# Altium PCB KCD_BRUSH_MOTOR_LH1.PcbDoc
Units mm, origin at the board's own origin, x right, y up, seen from the top; angles counter-clockwise.
Board outline 16.2 x 14.79 mm, 2 copper layers (Top Layer, Bottom Layer); 8 components, 7 nets, 27 pads, 6 vias.
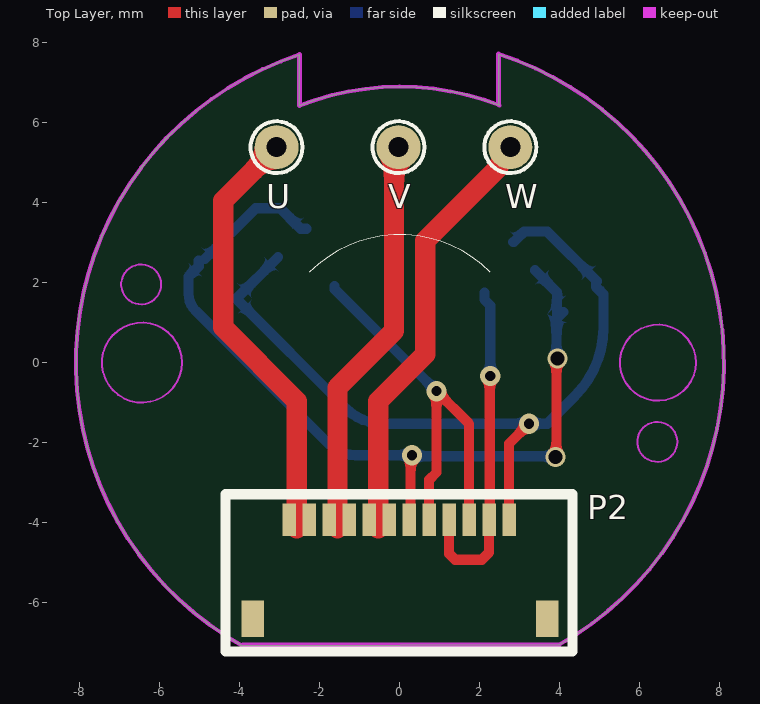
[diagram p0: Top Layer view]
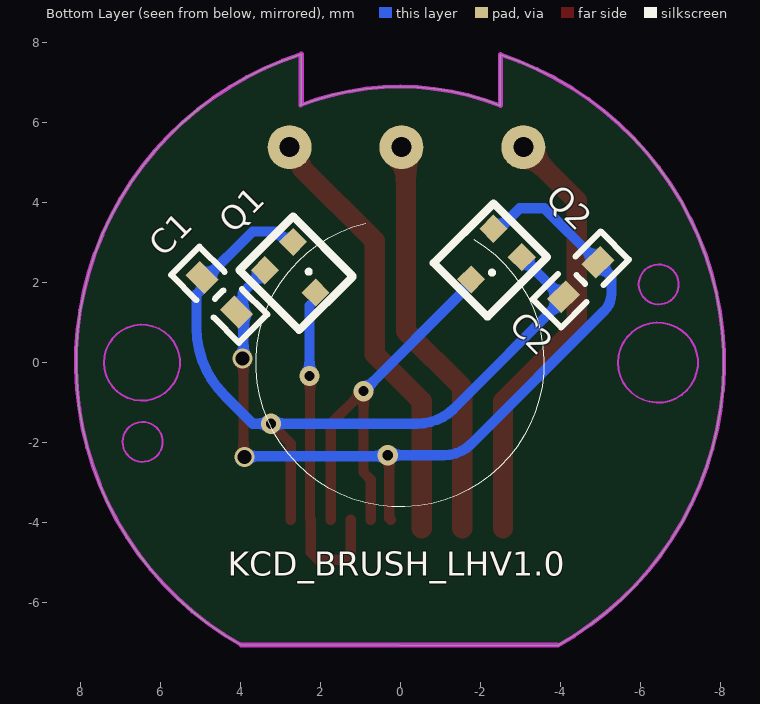
[diagram p1: Bottom Layer view, seen from below]

## Layer stack, top to bottom
Top Solder: solder mask 0.0102, Solder Resist, Dk 3.5
Top Layer: signal copper 0.0356
Dielectric 1: dielectric 0.32, FR-4, Dk 4.8
Bottom Layer: signal copper 0.0356
Bottom Solder: solder mask 0.0102, Solder Resist, Dk 3.5

## Board outline
-3.941,-7.074 cw(c0.001,0.002) -2.511,7.703 -2.511,6.429 cw(c0.001,0.002) 2.493,6.436 2.469,6.46 2.469,7.717 cw(c0.001,0.002) 3.976,-7.056

## Design rules (kind name [scope] priority, off if disabled: settings)
Clearance [All] p1: gap=0.203 ignorepadtopadclearanceinfootprint=FALSE except(0.15: Arc-SMDPad Track-SMDPad SMDPad-SMDPad)
PolygonConnect [All] p1: connectstyle=Relief reliefconductorwidth=0.254 reliefentries=4 polygonreliefangle="90 Angle" airgapwidth=0.254
RoutingVias [All] p1: holewidth=0.254 width=0.508 viastyle="Through Hole" minholewidth=0.127 minwidth=0.254 maxholewidth=0.762 maxwidth=1.27
SolderMaskExpansion [All] p1: expansion=0.102 istentingtop=FALSE
Width [All] p1: maxlimit=0.762 minlimit=0.203 preferedwidth=0.254
30 further rules are at their usual default settings.

## Components (designator, comment, footprint, x,y, rotation, side; value= is the part's Value field where it differs from the comment)
C1 "100nF/50V" "C 0402_M" 4.521,1.702 r225 bottom (schematic designator C6)
C2 "100nF/50V" "C 0402_M" -4.52,2.082 r135 bottom (schematic designator C6)
P2 "Header 12" SMD-12 2.731,-3.925 r180 top
Q1 "MT9101DT" VTDFN-6_L1.6x1.6 2.373,2.014 r315 bottom
Q2 "MT9101DT" VTDFN-6_L1.6x1.6 -2.039,2.344 r45 bottom
U "HD" HD -3.083,5.387 r90 top
V "HD" HD -0.035,5.387 r90 top
W "HD" HD 2.759,5.387 r90 top

## Footprints (in the part's own frame and the unit in brackets; to place one, negate y for a bottom-side part, rotate by r counter-clockwise, add the part's x,y. Pads: shape width x height; smd on the part's side, far side on the other; paste and mask are expansions set on the pad)
"C 0402_M" [mil] "无极性贴片电容"
  rect 26x20 smd: 1(-24,0) 2(24,0)
  silkscreen extent -47,-20 47,20, body extent -20,-10 20,10, height 21
HD [mm]
  round 1.1 hole 0.5: 1(0,0)
  silkscreen extent -0.65,-0.65 0.65,0.65
SMD-12 [mil]
  rect 22x36 smd: 0(252.38,97.5) 0/2(-37.62,97.5)
  rect 13x32 smd: 1(216.53,0) 2(196.85,0) 3(177.16,0) 4(157.48,0) 5(137.8,0) 6(118.11,0) 7(98.43,0) 8(78.74,0) 9(59.05,0) 10(39.37,0) 11(19.68,0) 12(0,0)
  silkscreen extent -62,-25 279,130
VTDFN-6_L1.6x1.6 [mm]
  rect 0.5x0.5 smd: 1(-0.5,-0.921) 2(0.5,-0.921) 3(0,0.369)
  silkscreen extent -0.95,-1.37 0.95,0.74

## Part data
C1 C2: library part C, "Capacitor"
P2: "Header, 12-Pin"

## Via types
v1: diameter 0.508, hole 0.254, Top Layer to Bottom Layer, tented both sides, 4 vias
v2: diameter 0.5, hole 0.35, Top Layer to Bottom Layer, tented both sides, 2 vias

## Nets (pads, with @x,y where several pads share a name; then routed paths per layer and width w, separated by ;. In a path a pad name is that pad's centre, name@x,y a point inside that pad or via, vN(x,y) a via of type N, cw(c..) or ccw(c..) an arc to the next point about the centre after c; other vN are vias at no path point)
3V3: C1.1 C2.1 P2.12 Q1.1 Q2.1 | length 19.9
  Top Layer w0.254: P2.12 2.731,-2.018 v1(3.226,-1.524)
  Bottom Layer w0.254: Q2.1 -4.089,1.596 -1.348,-1.145 ccw(c-0.434,-0.231) -0.434,-1.524 v1(3.226,-1.524) 3.683,-1.524 4.385,-0.822 ccw(c2.691,0.872) 5.086,0.872 5.086,1.711 4.898,1.899 4.898,2.006 4.928,2.035 3.686,3.277 3.103,3.277 2.845,3.019 Q1.1@2.835,3.019
GND: C1.2 C2.2 P2.7 Q1.2 Q2.2 | length 21.9
  Top Layer w0.254: P2.7 0.268,-3.888 0.268,-2.348 v1(0.305,-2.311) ; v2(3.886,-2.362) 3.912,-2.337 3.912,0.076 v2(3.937,0.102)
  Bottom Layer w0.254: C2.2@-5.029,2.547 -5.029,2.411 -5.283,2.157 -5.283,1.725 ccw(c-4.676,1.725) -5.105,1.295 -1.778,-2.032 ; C2.2@-4.877,2.591 -3.607,3.861 -2.991,3.861 -2.479,3.349 Q2.2 ; -1.777,-2.033 ccw(c-1.103,-1.357) -1.103,-2.311 v1(0.305,-2.311) 0.33,-2.337 3.861,-2.337 v2(3.886,-2.362) ; Q1.2 3.925,1.765 C1.2@3.925,1.131 ; v2(3.937,0.102) 3.912,0.127 3.912,1.092 C1.2
LH_0: P2.9 P2.11 Q1.3 | length 8.6
  Top Layer w0.254: P2.9 1.231,-4.776 1.38,-4.925 2.048,-4.925 2.231,-4.741 P2.11 2.246,-3.91 2.246,-0.345 v1(2.261,-0.33)
  Bottom Layer w0.254: Q1.3 2.112,1.579 2.261,1.431 v1(2.261,-0.33)
LH_1: P2.8 P2.10 Q2.3 | length 10.5
  Top Layer w0.254: P2.8 0.731,-2.927 0.914,-2.744 v1(0.914,-0.711) 1.731,-1.528 P2.10
  Bottom Layer w0.254: Q2.3@-1.632,1.911 -1.632,1.835 v1(0.914,-0.711)
U: P2.1 P2.2 U.1 | length 10.8
  Top Layer w0.508: U.1 -4.42,4.051 -4.42,0.882 -2.575,-0.963 -2.575,-3.925 -2.575,-4.138
V: P2.3 P2.4 V.1 | length 10.2
  Top Layer w0.508: -1.559,-4.138 -1.559,-3.925 -1.559,-0.619 -0.148,0.791 -0.148,5.274 V.1
W: P2.5 P2.6 W.1 | length 10.9
  Top Layer w0.508: -0.543,-4.138 -0.543,-3.925 -0.543,-0.963 0.635,0.215 0.635,3.048 2.463,4.876 2.463,4.931 2.759,5.227 W.1
pads on no net: P2.0 P2.0/2

## Keep-outs
Keep-Out Layer:
  circle w0.05: c-6.449,0.002 r1
  circle w0.05: c6.451,0.002 r0.95
  circle w0.05: c6.435,-1.979 r0.5
  circle w0.05: c-6.468,1.958 r0.5
  lines w0.1: -3.941,-7.074 cw(c0.001,0.002) -2.511,7.703 ; -2.511,6.429 cw(c0.001,0.002) 2.493,6.436 ; 2.469,7.717 cw(c0.001,0.002) 3.976,-7.056
  lines w0.127: -3.923,-7.056 3.976,-7.056 ; -2.511,6.429 -2.511,7.703 ; 2.469,6.46 2.469,7.717

## Silkscreen, mask and mechanical layers (free items; w line width, h text height)
Top Overlay:
  lines w0.02: -2.262,2.262 cw(c0,0) 2.263,2.262
Bottom Overlay:
  lines w0.02: -1.844,3.083 ccw(c0.002,-0.008) 0.86,3.489
  text "KCD_BRUSH_LHV1.0" at 4.308,-5.332 h0.6